# Altium PCB touch-2ch-v3.PcbDoc
Units mm, origin at the board's own origin, x right, y up, seen from the top; angles counter-clockwise.
Board outline 90.83 x 39.88 mm, 2 copper layers (Top Layer, Bottom Layer); 41 components, 41 nets, 99 pads, 0 vias.
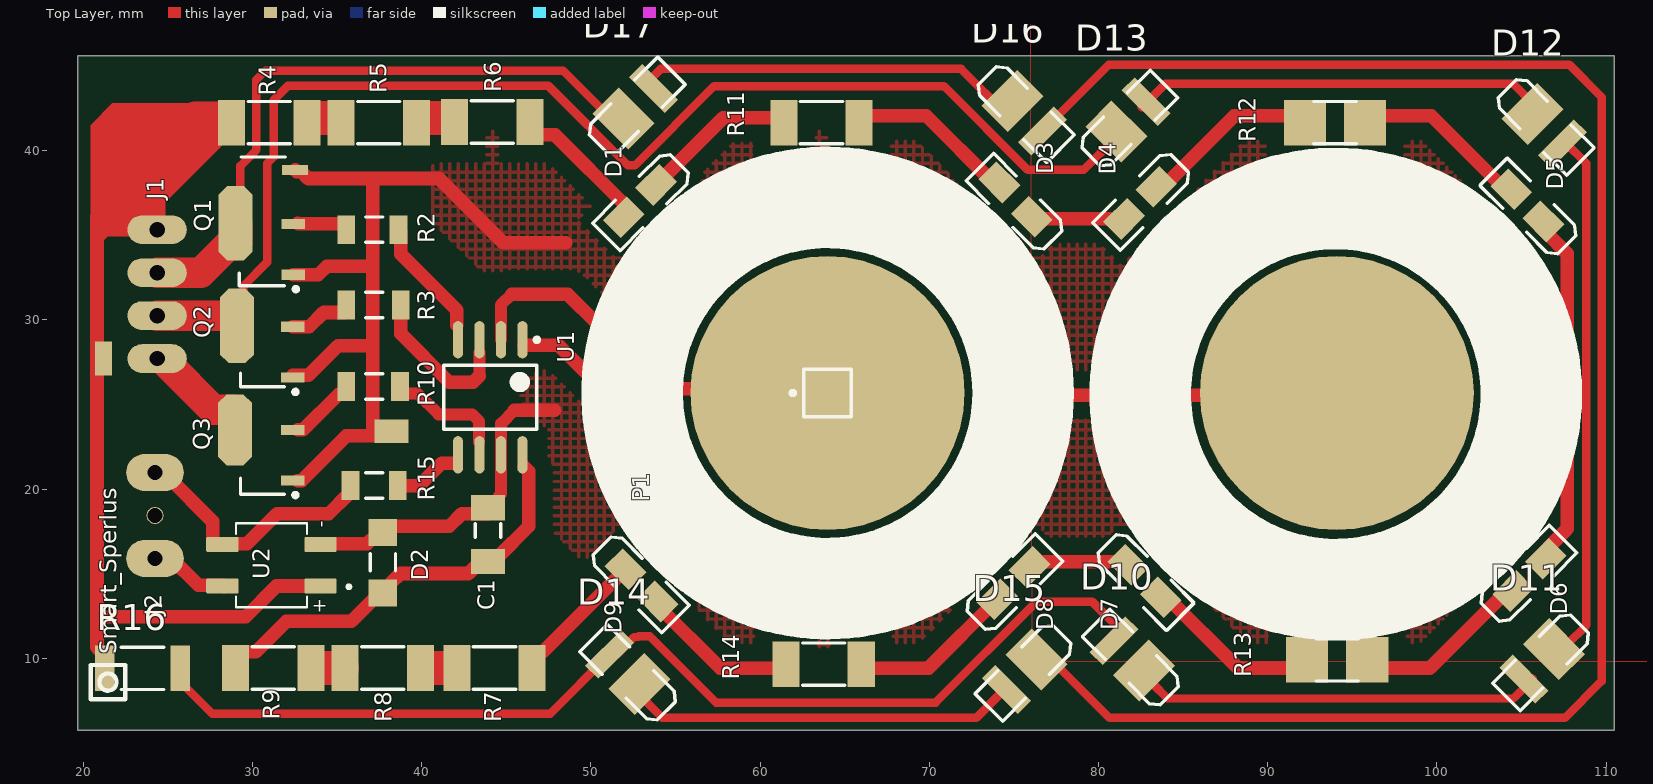
[diagram p0: Top Layer view]
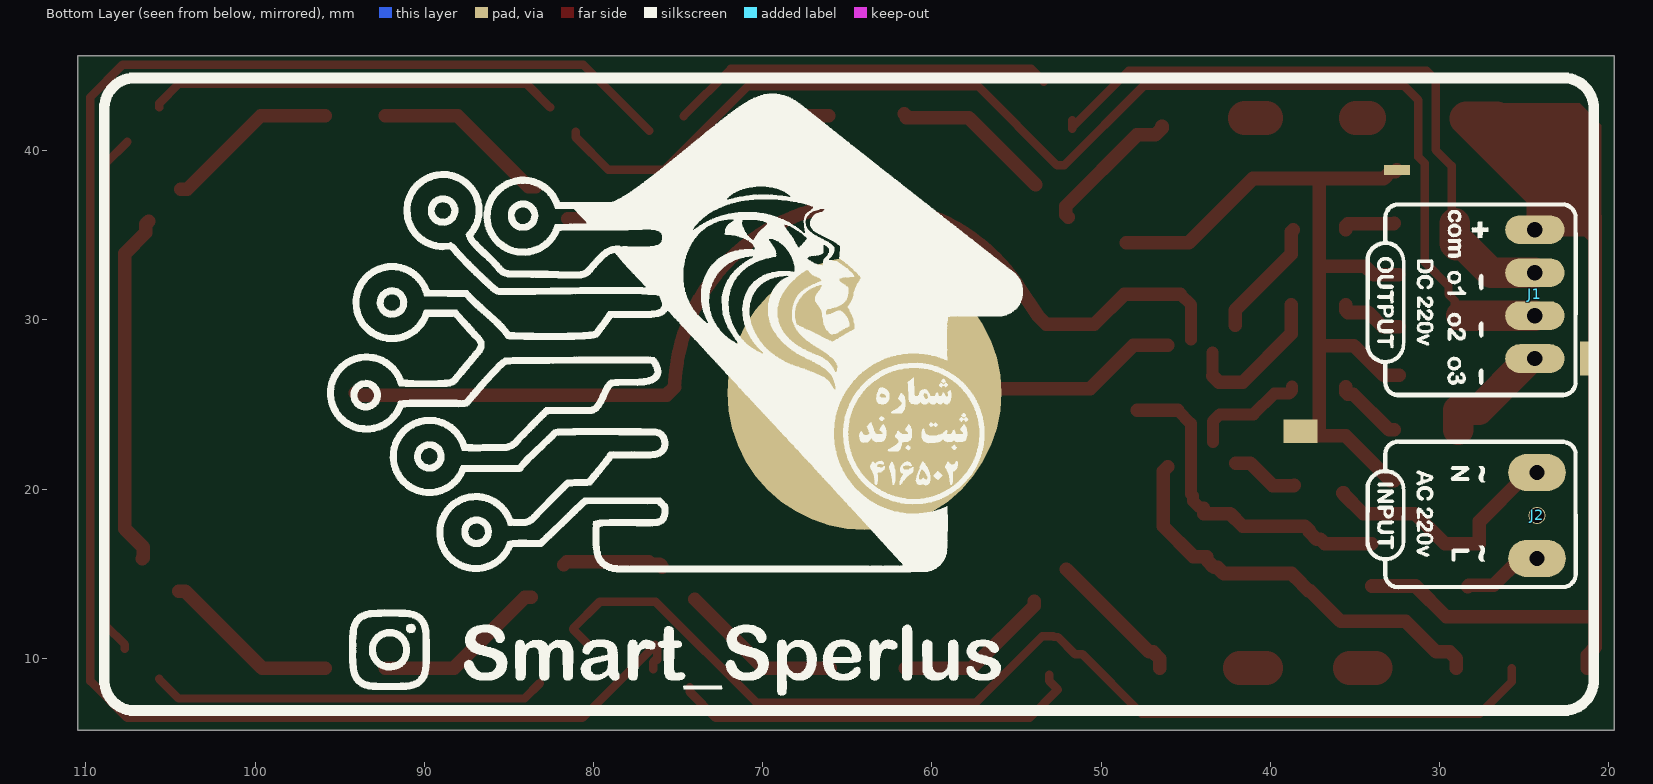
[diagram p1: Bottom Layer view, seen from below]

## Layer stack, top to bottom
Top Solder: solder mask 0.0102, Solder Resist, Dk 3.5
Top Layer: signal copper 0.0356
Dielectric 1: dielectric 0.32, FR-4, Dk 4.8
Bottom Layer: signal copper 0.0356
Bottom Solder: solder mask 0.0102, Solder Resist, Dk 3.5

## Board outline
110.49,5.738 19.663,5.738 19.663,45.616 110.49,45.616

## Design rules (kind name [scope] priority, off if disabled: settings)
Clearance Clearance_1 [InPolygon] p1: gap=1 ignorepadtopadclearanceinfootprint=FALSE
Clearance [All] p2: gap=0.4 ignorepadtopadclearanceinfootprint=FALSE
PolygonConnect [All] p1: connectstyle=Relief reliefconductorwidth=0.254 reliefentries=4 polygonreliefangle="90 Angle" airgapwidth=0.254
RoomDefinition touch-2ch-v3 [InComponentClass('touch-2ch-v3')] p1: confinementstyle=ConfineIn formatcopy=TRUE lockcomponents=FALSE outline 116.078,-4.953 247.904,-4.953 247.904,23.114 116.078,23.114
RoutingLayers [All] p1: top layer_v5=FALSE bottom layer_v5=TRUE
RoutingVias [All] p1: holewidth=0.711 width=2.5 viastyle="Through Hole" minholewidth=0.711 minwidth=1.27 maxholewidth=0.711 maxwidth=2
SolderMaskExpansion [All] p1: expansion=0.102 istentingtop=FALSE
Width [All] p1: maxlimit=3 minlimit=0.4 preferedwidth=1
29 further rules are at their usual default settings.

## Components (designator, comment, footprint, x,y, rotation, side; value= is the part's Value field where it differs from the comment)
C1 "=Value" "CAP 1206" 37.697,15.644 r90 top
D1 "LED2" 3.2X1.6X1.1#1 52.959,36.957 r45 top
D2 "Diode" C1206 43.92,17.549 r270 top
D3 "LED2" 3.2X1.6X1.1#2 75.035,36.98 r315 top
D4 "LED2" 3.2X1.6X1.1#3 82.528,36.98 r45 top
D5 "LED2" 3.2X1.6X1.1#3 105.41,36.703 r315 top
D6 "LED2" 3.2X1.6X1.1#1 105.41,14.986 r225 top
D7 "LED2" 3.2X1.6X1.1#4 82.782,14.501 r135 top
D8 "LED2" 3.2X1.6X1.1#4 75.035,14.501 r225 top
D9 "LED2" 3.2X1.6X1.1#3 52.937,14.374 r135 top
D10 "LED2" 3.2X1.6X1.1#5 81.915,10.033 r315 top
D11 "LED2" 3.2X1.6X1.1#5 106.156,9.763 r45 top
D12 "LED2" 3.2X1.6X1.1#5 106.426,41.402 r135 top
D13 "LED2" 3.2X1.6X1.1#5 81.818,41.892 r225 top
D14 "LED2" 3.2X1.6X1.1#6 52.197,9.144 r315 top
D15 "LED2" 3.2X1.6X1.1#5 75.565,9.144 r45 top
D16 "LED2" 3.2X1.6X1.1#5 75.692,42.164 r135 top
D17 "LED2" 3.2X1.6X1.1#5 52.705,42.672 r225 top
J1 "Header4X1" "HEADER 4X1" 24.362,35.329 r270 bottom
J2 "Header3X1" "HEADER 3X1" 24.235,15.898 r90 bottom
P1 "Plug" PIN1 63.986,25.677 r90 top
Q1 "Triac" SOT89N#1 30.607,34.163 r180 top
Q2 "Triac" SOT89N#2 30.585,28.091 r180 top
Q3 "Triac" SOT89N#3 30.585,21.995 r180 top
R2 "10K" "RES 1206 (3216X08L)"#1 37.189,35.329 r180 top
R3 "10K" "RES 1206 (3216X08L)"#2 37.189,30.884 r180 top
R4 "10K" "RES 2010 (5026X08L)"#1 30.988,41.656 r0 top
R5 "10K" "RES 2010 (5026X08L)"#1 37.465,41.656 r0 top
R6 "10K" "RES 2010 (5026X08L)"#1 44.174,41.69 r0 top
R7 "10K" "RES 2010 (5026X08L)"#1 44.301,9.421 r180 top
R8 "10K" "RES 2010 (5026X08L)"#1 37.697,9.421 r180 top
R9 "10K" "RES 2010 (5026X08L)"#1 31.22,9.421 r180 top
R10 "10K" "RES 1206 (3216X08L)"#3 37.189,26.058 r180 top
R11 "10K" "RES 2010 (5026X08L)"#1 63.627,41.656 r0 top
R12 "10K" "RES 2010 (5026X08L)"#2 93.98,41.656 r0 top
R13 "10K" "RES 2010 (5026X08L)"#3 94.107,9.906 r180 top
R14 "10K" "RES 2010 (5026X08L)"#1 63.754,9.652 r180 top
R15 "10K" "RES 1206 (3216X08L)"#4 37.189,20.216 r0 top
R16 "10K" "RES 2010 (5026X08L)"#4 23.495,9.398 r0 top
U1 "ATtiny15L-1SC" 8S2_N 44.047,25.423 r270 top
U2 "MB6S" SOIC245P670X270-4N 31.115,15.494 r180 top

## Footprints (in the part's own frame and the unit in brackets; to place one, negate y for a bottom-side part, rotate by r counter-clockwise, add the part's x,y. Pads: shape width x height; smd on the part's side, far side on the other; paste and mask are expansions set on the pad)
3.2X1.6X1.1#1 [mm] "SMT LED; 2 Flat Leads"
  rect 2x1.5 smd: 1(-1.347,0.09) 2(1.347,0.09)
  silkscreen extent -2.9,-1.15 3.2,1.15
3.2X1.6X1.1#2 [mm] "SMT LED; 2 Flat Leads"
  rect 2x1.5 smd: 1(-1.437,0.18) 2(1.347,0.09)
  silkscreen extent -2.9,-1.15 3.2,1.15
3.2X1.6X1.1#3 [mm] "SMT LED; 2 Flat Leads"
  rect 2x1.5 smd: 1(-1.437,0) 2(1.257,0)
  silkscreen extent -2.9,-1.15 3.2,1.15
3.2X1.6X1.1#4 [mm] "SMT LED; 2 Flat Leads"
  rect 2x1.5 smd: 1(-1.257,0) 2(1.437,0)
  silkscreen extent -2.9,-1.15 3.2,1.15
3.2X1.6X1.1#5 [mm] "SMT LED; 2 Flat Leads"
  rect 1.1x3 smd: 1(-1.414,0)
  rect 2.2x3 smd: 2(1.086,0)
  silkscreen extent -2.9,-1.15 3.2,1.15
3.2X1.6X1.1#6 [mm] "SMT LED; 2 Flat Leads"
  rect 1.1x3 smd: 1(-1.541,0)
  rect 2.2x3 smd: 2(0.959,0)
  silkscreen extent -2.9,-1.15 3.2,1.15
8S2_N [mm] "SOP, 8-Leads, Body 5.3x5.3mm, Pitch 1.27mm, IPC Medium Density"
  oval 2.2x0.6 smd: 1(-3.4,1.905) 2(-3.4,0.635) 3(-3.4,-0.635) 4(-3.4,-1.905) 5(3.4,-1.905) 6(3.4,-0.635) 7(3.4,0.635) 8(3.4,1.905)
  silkscreen extent -3.52,-2.75 1.9,2.88, body extent -2.73,-2.75 2.73,2.75, height 2.16
C1206 [mm] "Chip Capacitor, Body 3.2x1.6mm, IPC High Density"
  rect 1.5x2 smd: 1(-1.35,0) 2(1.83,0)
  silkscreen extent -0.4,-0.75 0.4,0.75, body extent -1.7,-0.9 1.7,0.9, height 1.3
"CAP 1206" [mm]
  rect 1.6x1.7 smd: 1(-1.778,0) 2(1.778,0)
  silkscreen extent -0.47,-0.75 0.53,0.75, body extent -1.49,-0.77 1.55,0.75, height 0.75
"HEADER 3X1" [mm]
  oval 2.2x3.4 hole 0.9: 1(0,0) 3(5.08,0)
  round 1 hole 0.9: 2(2.54,0)
  body extent -1.24,-1.27 6.38,1.27, height 8.38
"HEADER 4X1" [mm]
  oval 1.7x3.5 hole 0.9: 1(0,0) 2(2.54,0) 3(5.08,0) 4(7.62,0)
  body extent -1.19,-1.22 8.97,1.32, height 8.38
PIN1 [mm] "Connector; Plug"
  round 16.2 all layers, no hole: 1(0,0)
  silkscreen extent -1.4,-1.4 1.4,2.17
"RES 1206 (3216X08L)"#1 [mm] "Chip Resistor, 2-Leads, Body 3.2x1.6mm, IPC High Density _ (0.125 W)"
  rect 1.05x1.7 smd: 1(-1.44,0) 2(1.651,0)
  silkscreen extent -0.5,-0.75 0.5,0.75, body extent -1.52,-0.76 1.53,0.76, height 0.6
"RES 1206 (3216X08L)"#2 [mm] "Chip Resistor, 2-Leads, Body 3.2x1.6mm, IPC High Density _ (0.125 W)"
  rect 1.05x1.7 smd: 1(-1.567,0) 2(1.651,0)
  silkscreen extent -0.5,-0.75 0.5,0.75, body extent -1.52,-0.76 1.53,0.76, height 0.6
"RES 1206 (3216X08L)"#3 [mm] "Chip Resistor, 2-Leads, Body 3.2x1.6mm, IPC High Density _ (0.125 W)"
  rect 1.05x1.7 smd: 1(-1.524,0) 2(1.651,0)
  silkscreen extent -0.5,-0.75 0.5,0.75, body extent -1.52,-0.76 1.53,0.76, height 0.6
"RES 1206 (3216X08L)"#4 [mm] "Chip Resistor, 2-Leads, Body 3.2x1.6mm, IPC High Density _ (0.125 W)"
  rect 1.05x1.7 smd: 1(-1.397,0) 2(1.397,0)
  silkscreen extent -0.5,-0.75 0.5,0.75, body extent -1.52,-0.76 1.53,0.76, height 0.6
"RES 2010 (5026X08L)"#1 [mm] "Chip Resistor, 2-Leads, Body 5.0x2.6mm, IPC High Density _ (0.250 W)"
  rect 1.6x2.7 smd: 1(-2.225,0) 2(2.225,0)
  silkscreen extent -1.25,-1.25 1.25,1.25, body extent -2.54,-1.27 2.54,1.27, height 0.6
"RES 2010 (5026X08L)"#2 [mm] "Chip Resistor, 2-Leads, Body 5.0x2.6mm, IPC High Density _ (0.250 W)"
  rect 2.5x2.7 smd: 1(-1.779,0) 2(1.777,0)
  silkscreen extent -1.25,-1.25 1.25,1.25, body extent -2.54,-1.27 2.54,1.27, height 0.6
"RES 2010 (5026X08L)"#3 [mm] "Chip Resistor, 2-Leads, Body 5.0x2.6mm, IPC High Density _ (0.250 W)"
  rect 2.5x2.7 smd: 1(-1.777,0) 2(1.779,0)
  silkscreen extent -1.25,-1.25 1.25,1.25, body extent -2.54,-1.27 2.54,1.27, height 0.6
"RES 2010 (5026X08L)"#4 [mm] "Chip Resistor, 2-Leads, Body 5.0x2.6mm, IPC High Density _ (0.250 W)"
  rect 1.15x2.7 smd: 1(-2.225,0) 2(2.225,0)
  silkscreen extent -1.25,-1.25 1.25,1.25, body extent -2.54,-1.27 2.54,1.27, height 0.6
SOIC245P670X270-4N [mm]
  rrect23% 1.91x0.91 smd: 1(-2.9,1.225) 2(-2.9,-1.225) 3(2.9,-1.225) 4(2.9,1.225)
  silkscreen extent -4.68,-2.48 2.1,2.48
SOT89N#1 [mm] "SOT89, 3-Leads, Body 4.5x2.4 mm, Pitch 1.5mm, Lead Span 4.1mm, IPC Medium Density"
  rect 1.4x0.6 smd: 1(-1.8,1.5) 3(-1.8,-1.5)
  oct 2x4.4 smd: 2(1.607,-1.548)
  silkscreen extent -2.07,-5.46 1.27,2.47, body extent -1.3,-2.3 1.3,2.3, height 1.6
SOT89N#2 [mm] "SOT89, 3-Leads, Body 4.5x2.4 mm, Pitch 1.5mm, Lead Span 4.1mm, IPC Medium Density"
  rect 1.4x0.6 smd: 1(-1.8,1.5) 3(-1.8,-1.5)
  oct 2x4.4 smd: 2(1.502,-1.548)
  silkscreen extent -2.07,2.05 1.3,2.47, body extent -1.3,-2.3 1.3,2.3, height 1.6
SOT89N#3 [mm] "SOT89, 3-Leads, Body 4.5x2.4 mm, Pitch 1.5mm, Lead Span 4.1mm, IPC Medium Density"
  rect 1.4x0.6 smd: 1(-1.8,1.5) 3(-1.8,-1.5)
  oct 2x4.2 smd: 2(1.629,-1.5)
  silkscreen extent -2.07,1.35 1.3,2.47, body extent -1.3,-2.3 1.3,2.3, height 1.6

## Part data
C1: library part Capacitor, "Capacitor"
D1 D3 D4 D5 D6 D7 D8 D9 D10 D11 D12 D13 D14 D15 D16 D17: "Typical RED, GREEN, YELLOW, AMBER GaAs LED", LatestRevisionDate=17-Jul-2002, LatestRevisionNote="Re-released for DXP Platform.", PackageDescription="SM LED; 2 Flat Leads", PackageReference=3.2X1.6X1.1, PackageVersion=Feb-2002, Published=8-Jun-2000, Publisher="Altium Limited"
D2: "Default Diode", Code_JEDEC=DO-214-AB, LatestRevisionDate=17-Jul-2002, LatestRevisionNote="Re-released for DXP Platform.", PackageDescription="DO-214-AB/SMC; 2 C-Bend Leads; Body 7.9 x 5.9 mm, inc. leads (LxW)", PackageReference=SMC, PackageVersion=Sep-1996, Published=8-Jun-2000, Publisher="Altium Limited"
Q1 Q2 Q3: "Silicon Bidirectional Triode Thyristor", ComponentLink1Description="Manufacturer Link", ComponentLink1URL=http://www.motorola.com/, DatasheetVersion=1999, LatestRevisionDate=17-Jul-2002, LatestRevisionNote="Re-released for DXP Platform.", Note="Pin 2 is electrically connected to Pin 4 (TAB)", PackageDescription="TO, Thru-Hole, Vertical, Heatsink Mounted; 3 In-Line Leads; Pitch 2.28 mm", PackageReference=369-03, Published=29-Sep-2000, Publisher="Altium Limited"
R2 R3 R4 R5 R6 R7 R8 R9 R10 R11 R12 R13 R14 R15 R16: library part Resistor, "Resistor", Power="1/4 W", Tolerance=5%
U1: "8-Bit AVR Microcontroller with 1K Byte of Flash Memory", Supplier Part Number 1=ATTINY15L-1SC-ND, ComponentLink1Description=Datasheet, ComponentLink1URL=http://www.atmel.com/dyn/resources/prod_documents/doc1187.pdf, ComponentLink2Description="Atmel.com Home", ComponentLink2URL=http://www.atmel.com, DatasheetVersion=1187E-AVR-06/02, LatestRevisionDate=16-Oct-2006, LatestRevisionNote="IPC-7351 Footprint Added.", PackageDescription="8-Lead, 0.208\" Body, Plastic Small Outline Package (EIAJ)", PackageReference=8S2, PackageVersion="revF, Apr-2008", Published=17-Sep-2003, Publisher="Altium Limited", Supplier 1=Digi-Key, Supplier 2=Mouser, Supplier Part Number 2=556-ATTINY15L1SC
U2: "Bridge Rectifier Single Phase Standard 600V Surface Mount 4-SOIC", Package="BESOP-4 Surge Components", Digi-Key_Part_Number=MB6SCT-ND, Digi-Key_Purchase_URL=https://www.digikey.com.tr/product-detail/en/on-semiconductor/MB6S/MB6SCT-ND/965654?utm_source=snapeda&utm_medium=aggregator&utm_campaign=symbol, MF="ON Semiconductor", MP=MB6S, SnapEDA_Link=https://www.snapeda.com/parts/MB6S/ON%20Semiconductor/view-part/2774209/?ref=snap
P1: LatestRevisionDate=17-Jul-2002, LatestRevisionNote="Re-released for DXP Platform.", Publisher="Altium Limited"

## Free pads (board coordinates)
  rect 2x1.4 all layers, no hole: 156(38.205,23.424)
  round 16.2 smd: 157(94.086,25.677)
  rect 1x2 all layers, no hole: 160(21.187,27.709)
  rect 1.524x0.6 all layers, no hole: 163(32.512,38.862)

## Nets (pads, with @x,y where several pads share a name; then routed paths per layer and width w, separated by ;. In a path a pad name is that pad's centre, name@x,y a point inside that pad or via, vN(x,y) a via of type N, cw(c..) or ccw(c..) an arc to the next point about the centre after c; other vN are vias at no path point)
GND: C1.2 D2.1 pad.156 pad.163 Q1.1 Q2.1 Q3.1 U1.7 U2.2 | length 69
  Top Layer w0.7: D2.1 44.17,18.899 44.569,19.299 44.569,19.597 44.682,19.709 U1.7 44.692,22.033 44.692,23.872 45.48,24.661
  Top Layer w0.8: Q2.1@32.384,26.717 33.299,26.717 35.053,28.471 37.103,28.471 ; Q1.1 33.888,32.663 34.394,33.17 37.103,33.17 ; pad.163 32.612,38.762 32.874,38.762 33.282,38.354 37.103,38.354 ; Q3.1@32.685,20.495 32.896,20.495 35.537,23.137 37.103,23.137 ; U2.2@33.997,16.764 36.778,16.764 37.035,17.022 37.247,17.022 37.697,17.472 37.697,17.549 37.951,17.803 41.634,17.803 42.38,18.549 D2.1@43.92,18.549 ; pad.156@37.604,23.137 37.103,23.137 ; 45.48,24.661 47.857,24.661 ; 48.517,34.544 44.831,34.544 41.021,38.354 37.103,38.354 ; 37.103,23.137 37.103,28.471 ; 37.103,28.471 37.103,33.17 ; 37.103,33.17 37.103,38.354
NetD1_1: D1.1 R6.2 | length 8.4
  Top Layer w0.8: R6.2@46.399,41.448 46.399,41.327 46.798,40.927 47.882,40.927 52.095,36.715 52.095,36.22 D1.1
NetD1_2: D1.2 R11.1 | length 9.5
  Top Layer w0.8: D1.2 57.808,41.933 R11.1@61.507,41.933 ; R11.1@61.507,42.06 R11.1@61.634,42.187
NetD3_1: D3.1 R11.2 | length 9.5
  Top Layer w0.8: R11.2@66.084,42.06 69.827,42.06 73.764,38.123 D3.1@73.955,38.123
NetD3_2: D3.2 D4.1 | length 5.7
  Top Layer w0.8: D3.2 76.545,36.091 76.722,35.914 76.772,35.964 80.663,35.964 80.84,35.787 81.017,35.964 D4.1
NetD4_2: D4.2 R12.1 | length 10.6
  Top Layer w0.8: D4.2 83.843,37.869 88.034,42.06 R12.1@92.307,42.06
NetD5_1: D5.1 R12.2 | length 10.3
  Top Layer w0.8: R12.2@95.863,42.06 99.672,42.06 104.013,37.719 D5.1
NetD5_2: D5.2 D6.1 | length 21
  Top Layer w0.8: D5.2 106.476,35.637 106.476,35.142 107.696,33.922 107.696,17.64 106.603,16.547 106.603,15.952 D6.1@106.68,15.875
NetD6_2: D6.2 R13.1 | length 10.5
  Top Layer w0.8: R13.1@95.863,9.421 99.591,9.421 104.14,13.97 D6.2
NetD7_1: D7.1 R13.2 | length 10.4
  Top Layer w0.8: D7.1 84.052,13.612 88.243,9.421 R13.2@92.307,9.421
NetD7_2: D7.2 D8.1 | length 6
  Top Layer w0.8: D8.1 76.1,15.566 76.595,15.566 76.722,15.693 81.589,15.693 D7.2
NetD8_2: D8.2 R14.1 | length 9.7
  Top Layer w0.8: R14.1@66.018,9.421 69.955,9.421 D8.2
NetD9_1: D9.1 R14.2 | length 9.4
  Top Layer w0.8: D9.1 53.953,13.103 57.635,9.421 R14.2@61.568,9.421
NetD9_2: D9.2 R7.1 | length 8.3
  Top Layer w0.8: R7.1 46.526,9.971 46.925,10.37 47.155,10.37 D9.2
NetD10_1: D10.1 D14.1 R16.2 | length 65.1
  Top Layer w0.5: R16.2 25.72,8.623 27.612,6.731 47.605,6.731 D14.1 51.532,10.234 52.552,11.254 52.783,11.254 52.832,11.303 53.467,11.303 57.393,7.377 70.376,7.377 76.334,13.335 79.629,13.335 81.211,11.753 81.211,11.71 D10.1@80.28,10.779
NetD10_2: D10.2 D11.1 | length 23.4
  Top Layer w0.5: D10.2@83.175,8.519 84.074,7.62 104.521,7.62 D11.1@105.68,8.779
NetD11_2: D11.2 D12.1 | length 31
  Top Layer w0.5: D12.1@107.553,40.529 108.839,39.243 108.839,11.938 107.702,10.801 D11.2@107.702,10.547
NetD12_2: D12.2 D13.1 | length 24.4
  Top Layer w0.5: D13.1@82.561,42.556 83.947,43.942 104.521,43.942 105.658,42.805 D12.2@105.658,42.551
NetD14_2: D14.2 D15.1 | length 24.4
  Top Layer w0.5: D14.2@53.076,9.027 53.076,8.667 52.558,8.148 54.229,6.477 72.771,6.477 74.311,8.017 D15.1@74.311,8.271
NetD15_2: D15.2 D16.1 | length 107.5
  Top Layer w0.5: D15.2@76.219,9.899 D15.2@76.219,10.687 ; D15.2 76.473,9.772 D15.2@76.473,9.358 ; D15.2@76.346,10.788 80.657,6.477 107.569,6.477 109.739,8.647 109.739,43.169 107.823,45.085 80.613,45.085 D16.1
NetD16_2: D16.2 D17.1 | length 22.8
  Top Layer w0.5: D17.1@53.375,44.077 54.129,44.831 71.882,44.831 D16.2@74.67,42.043
NetJ1_4: J1.4 Q3.2 | length 6.4
  Top Layer w1.8: J1.4@24.83,27.548 27.683,24.695 28.856,24.695 28.883,24.668 Q3.2@28.883,23.495
NetJ2_1: J2.1 U2.4 | length 4.8
  Top Layer w0.8: J2.1 25.213,15.898 26.806,14.305 28.257,14.305 U2.4@28.338,14.224
NetJ2_3: J2.3 R15.1 U2.3 | length 15.7
  Top Layer w0.8: J2.3@23.713,20.737 24.983,20.737 27.638,18.083 27.638,16.764 29.673,16.764 31.451,18.542 34.499,18.542 35.667,19.71 35.667,19.766 R15.1@35.723,19.766
NetP1_1: P1.1 U1.1 | length 18
  Top Layer w0.8: U1.1@46.052,28.487 48.094,28.487 50.651,25.931 P1.1@62.97,25.931
NetQ1_3: Q1.3 R2.2 | length 3.1
  Top Layer w0.8: Q1.3@32.685,35.714 32.712,35.687 35.413,35.687 35.538,35.562 R2.2
NetQ2_3: Q2.3 R3.2 | length 3.9
  Top Layer w0.8: Q2.3 33.356,29.591 34.198,30.434 35.413,30.434 35.538,30.559 R3.2
NetQ3_3: Q3.3 R10.2 | length 4.1
  Top Layer w0.8: Q3.3@32.685,23.495 32.975,23.495 35.088,25.608 35.413,25.608 35.538,25.733 R10.2
NetR4_2: R4.2 R5.1 | length 0.8
  Top Layer w2: 34.163,41.933 R5.1@34.925,41.933
NetR5_2: R5.2 R6.1 | length 1.3
  Top Layer w2: R5.2@40.237,41.933 R6.1@41.507,41.933
NetR7_2: R7.2 R8.1 | length 1.5
  Top Layer w2: R8.1@40.259,9.421 R7.2@41.783,9.421
NetR8_2: R8.2 R9.1 | length 1.5
  Top Layer w2: R9.1@33.782,9.421 R8.2@35.306,9.421
o1: pad.157 U1.2 | length 61.6
  Top Layer w0.7: U1.2 44.682,30.884 45.317,31.519
  Top Layer w0.8: 45.317,31.519 48.619,31.519 50.397,29.741 53.18,29.741 53.241,29.741 53.71,30.209 54.919,32.017 cw(c64.039,25.914) 66.041,36.703 cw(c63.994,25.672) 75.191,26.373 75.213,26.023 75.682,25.554 75.994,25.554 93.963,25.554 pad.157
o2: R2.1 U1.4 | length 7.1
  Top Layer w0.8: R2.1 38.753,35.204 38.753,33.891 42.081,30.563 U1.4@42.081,29.674
o3: R3.1 U1.3 | length 9.1
  Top Layer w0.7: 43.412,26.693 U1.3@43.412,28.073
  Top Layer w0.8: R3.1 38.756,29.19 41.634,26.312 43.031,26.312 43.412,26.693
o4: R10.1 U1.6 | length 6.9
  Top Layer w0.7: R10.1 38.713,25.82 38.887,25.645 39.76,25.645 40.999,24.407 42.981,24.407 43.392,23.996 U1.6@43.392,22.772
o5: R15.2 U1.5 | length 4
  Top Layer w0.8: R15.2 38.599,20.202 39.842,20.202 41.171,21.531 U1.5@42.041,21.531
V1: D17.2 J1.2 Q1.2 | length 39.2
  Top Layer w0.5: Q1.2@29.286,35.892 29.286,39.101 30.226,40.041 30.226,44.196 30.762,44.732 48.359,44.732 D17.2@51.683,41.408 ; D17.2@51.699,41.285 D17.2@51.699,41.805
  Top Layer w0.6: Q1.2@29.105,35.711 Q1.2@29.286,35.892
  Top Layer w1.8: J1.2 26.947,32.789 28.569,34.411 29.005,34.411 29.105,34.511 Q1.2@29.105,35.711
V2: D13.2 J1.3 Q2.2 | length 75.8
  Top Layer w0.5: Q2.2 29.083,31.119 29.465,31.501 29.465,32.005 30.861,33.401 30.861,39.243 31.242,39.624 31.242,42.983 32.092,43.833 47.48,43.833 52.18,39.133 52.595,39.133 57.277,43.815 70.866,43.815 75.819,38.862 79.121,38.862 81.05,40.791 D13.2
  Top Layer w1.8: J1.3 Q2.2@28.702,30.249
vcc: C1.1 D2.2 R9.2 U1.8 | length 24.8
  Top Layer w0.8: R9.2 28.995,9.971 29.395,10.37 30.182,10.37 32.004,12.192 35.846,12.192 37.647,13.993 C1.1@37.697,13.993 ; C1.1@37.747,13.993 38.146,14.393 38.146,14.413 38.742,15.009 42.759,15.009 43.119,15.369 43.32,15.369 43.759,15.808 43.759,16.009 44.538,16.009 46.333,17.803 46.333,21.042 U1.8@46.052,21.323
VDD: J1.1 pad.160 R4.1 R16.1 U2.1 | length 58.4
  Top Layer w0.8: R16.1 21.27,10.173 20.806,10.637 20.806,12.446 ; 26.625,41.91 20.806,36.091 20.806,27.709 20.806,12.446 ; U2.1 31.414,14.269 29.591,12.446 20.806,12.446
  Top Layer w2: 23.854,36.218 23.854,37.361 28.403,41.91 26.625,41.91
pads on no net: J2.2

## Polygon pours and split planes (outlines as drawn)
GND on Top Layer "GND_L01_P027" (hatched 90Degree grid 0.508 track 0.203, pour order 27): 40.64,39.116 42.672,41.148 106.172,41.148 108.966,38.354 108.966,13.208 103.251,7.493 100.076,10.668 54.61,10.668 47.498,17.78 47.498,23.495 45.847,25.146 45.847,32.893 43.561,32.893 40.64,35.814
GND on Top Layer "NONET_L01_P024" (hatched 90Degree grid 0.5 track 0.2, shelved, pour order 24): 75.946,71.374 115.697,71.374 115.57,71.247 115.57,9.779 76.073,9.779

## Keep-outs
Keep-Out Layer:
  lines w0.7: 0,-0.381 0,85 150,85 150,0 0,0

## Other copper
Top Layer:
  pour cut-out: 74.549,40.132 76.581,40.132 77.597,41.148 79.756,38.989 80.518,38.989 80.518,36.322 80.137,35.941 80.114,35.964 76.772,35.964 76.772,36.131 74.041,38.862
  pour cut-out: 75.819,11.684 75.819,12.192 78.105,14.478 78.359,14.224 80.899,14.224 80.899,11.049 81.661,10.287 80.391,9.017 76.708,9.017
  pour cut-out: 45.317,31.519 48.619,31.519 50.397,29.741 53.952,29.741 56.007,27.686 56.007,23.876 53.975,25.908 50.292,25.908 48.094,28.106 48.094,28.487 44.792,28.487 44.682,28.597 44.682,30.884
  region net VDD: 20.425,34.617 20.425,41.507 21.717,42.799 27.305,42.799 27.305,40.05 24.489,37.234 24.235,37.234 24.235,34.948 24.108,34.821 23.981,34.948 21.441,34.948 20.806,34.313

## Silkscreen, mask and mechanical layers (free items; w line width, h text height)
Top Overlay:
  circle w6: c63.986,25.677 r11.557
  circle w6: c94.024,25.615 r11.557
  circle w0.254: c21.455,8.589 r0.508
  lines w0.2: 29.21,32.766 29.21,32.004 31.877,32.004 ; 29.285,26.045 29.285,26.849
  lines w0.254: 20.439,7.573 22.471,7.573 22.471,9.605 20.439,9.605 20.439,7.573
  text "Smart_Sperlus" at 21.963,10.24 h1 r90
Bottom Overlay:
  drawing of 87 lines, arcs and shapes, not listed
Bottom Solder:
  the board outline again, w0.2

## Text inside footprints (layer, text, board x,y; h text height)
U2: Top Overlay "-" at 33.804,18.138 h0.81 r270; Top Overlay "+" at 34.439,13.439 h0.81 r180